# Altium PCB PDP_V2 - Copy.PcbDoc
Units mil, origin at the board's own origin, x right, y up, seen from the top; angles counter-clockwise.
Board outline 5460 x 4800 mil, 2 copper layers (Top Layer, Bottom Layer); 52 components, 42 nets, 329 pads, 53 vias.
Unrouted connection lines stored in the file: 27.
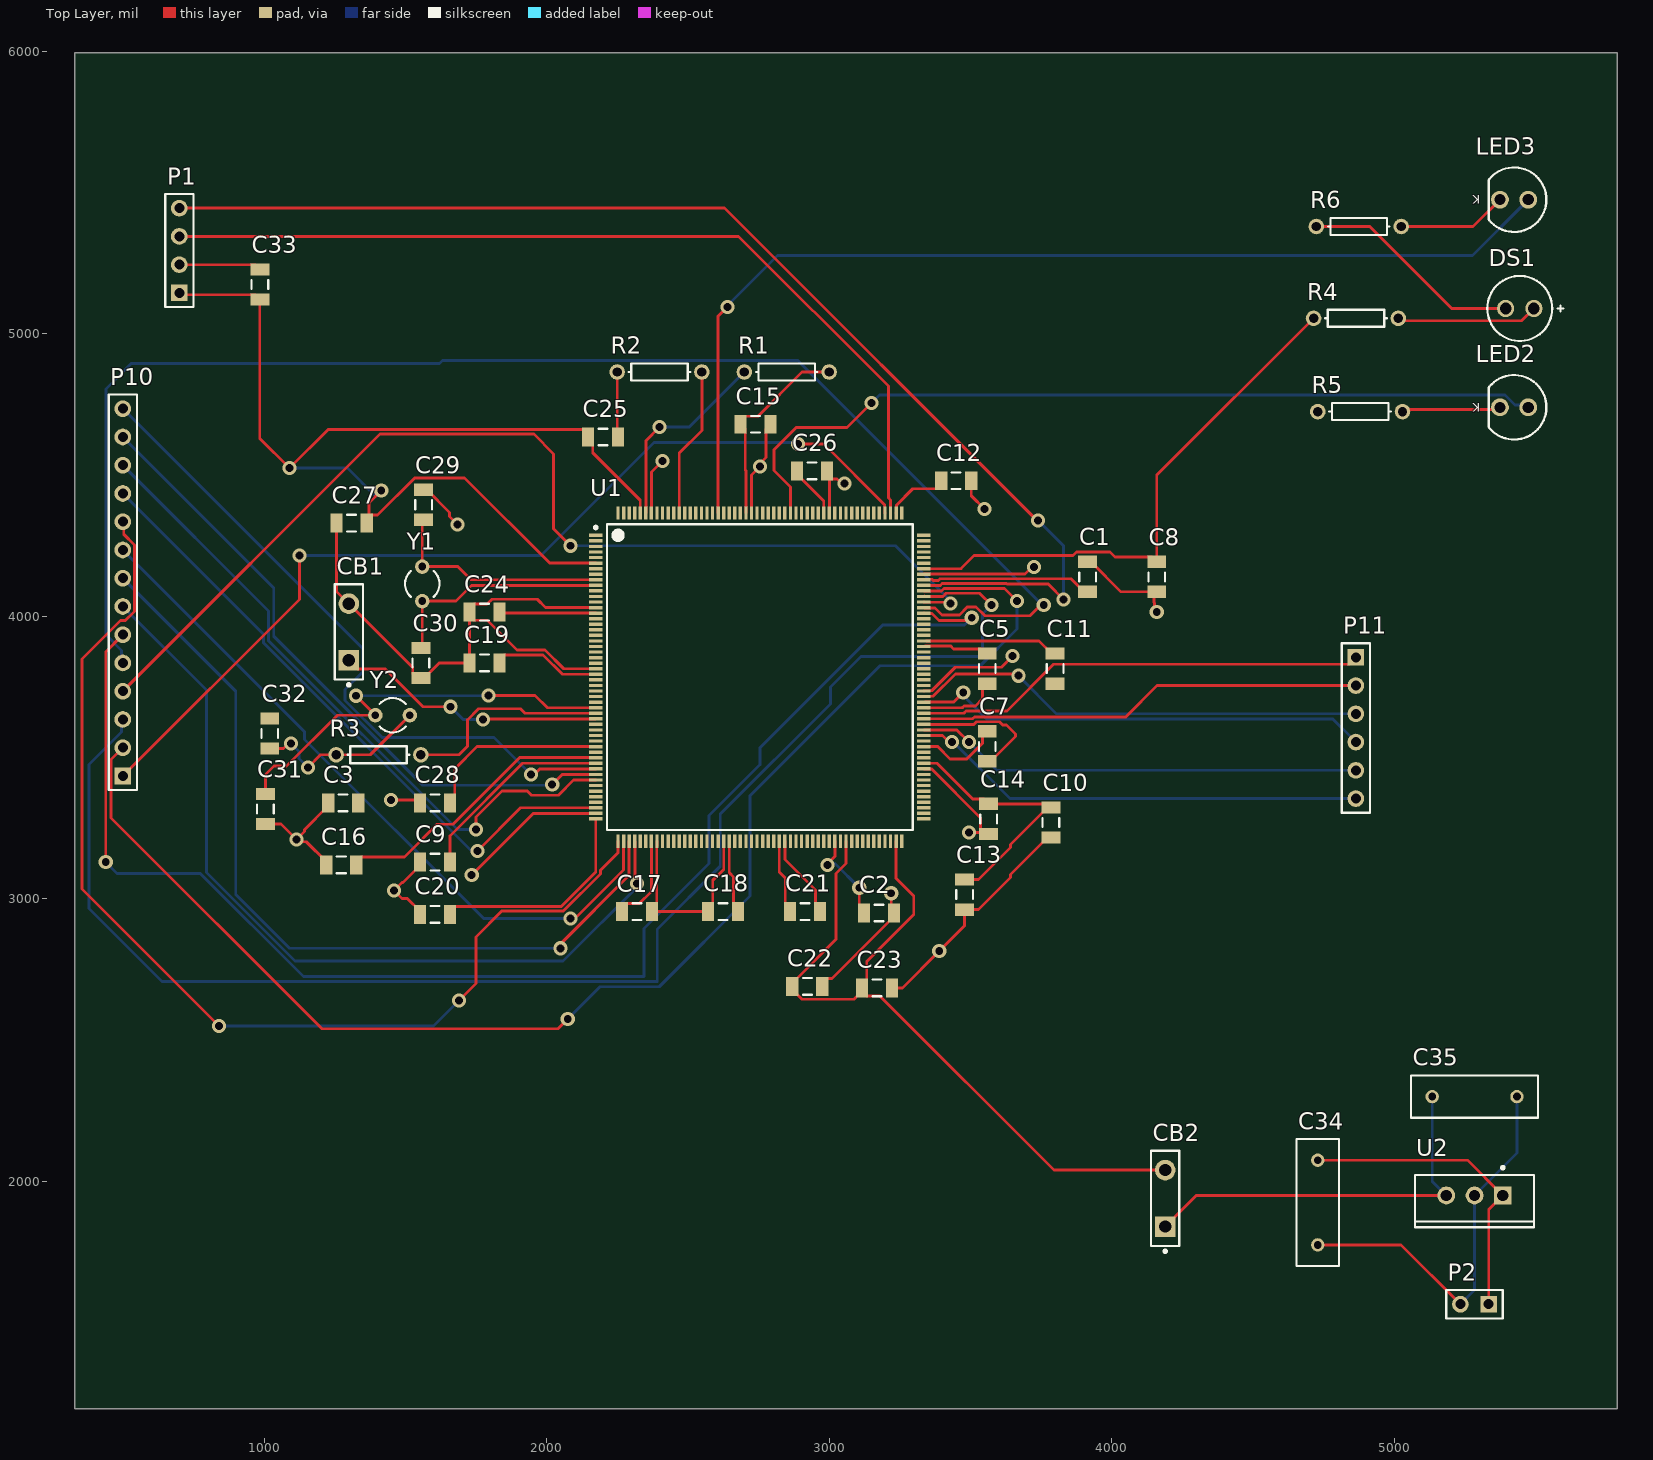
[diagram p0: Top Layer view]
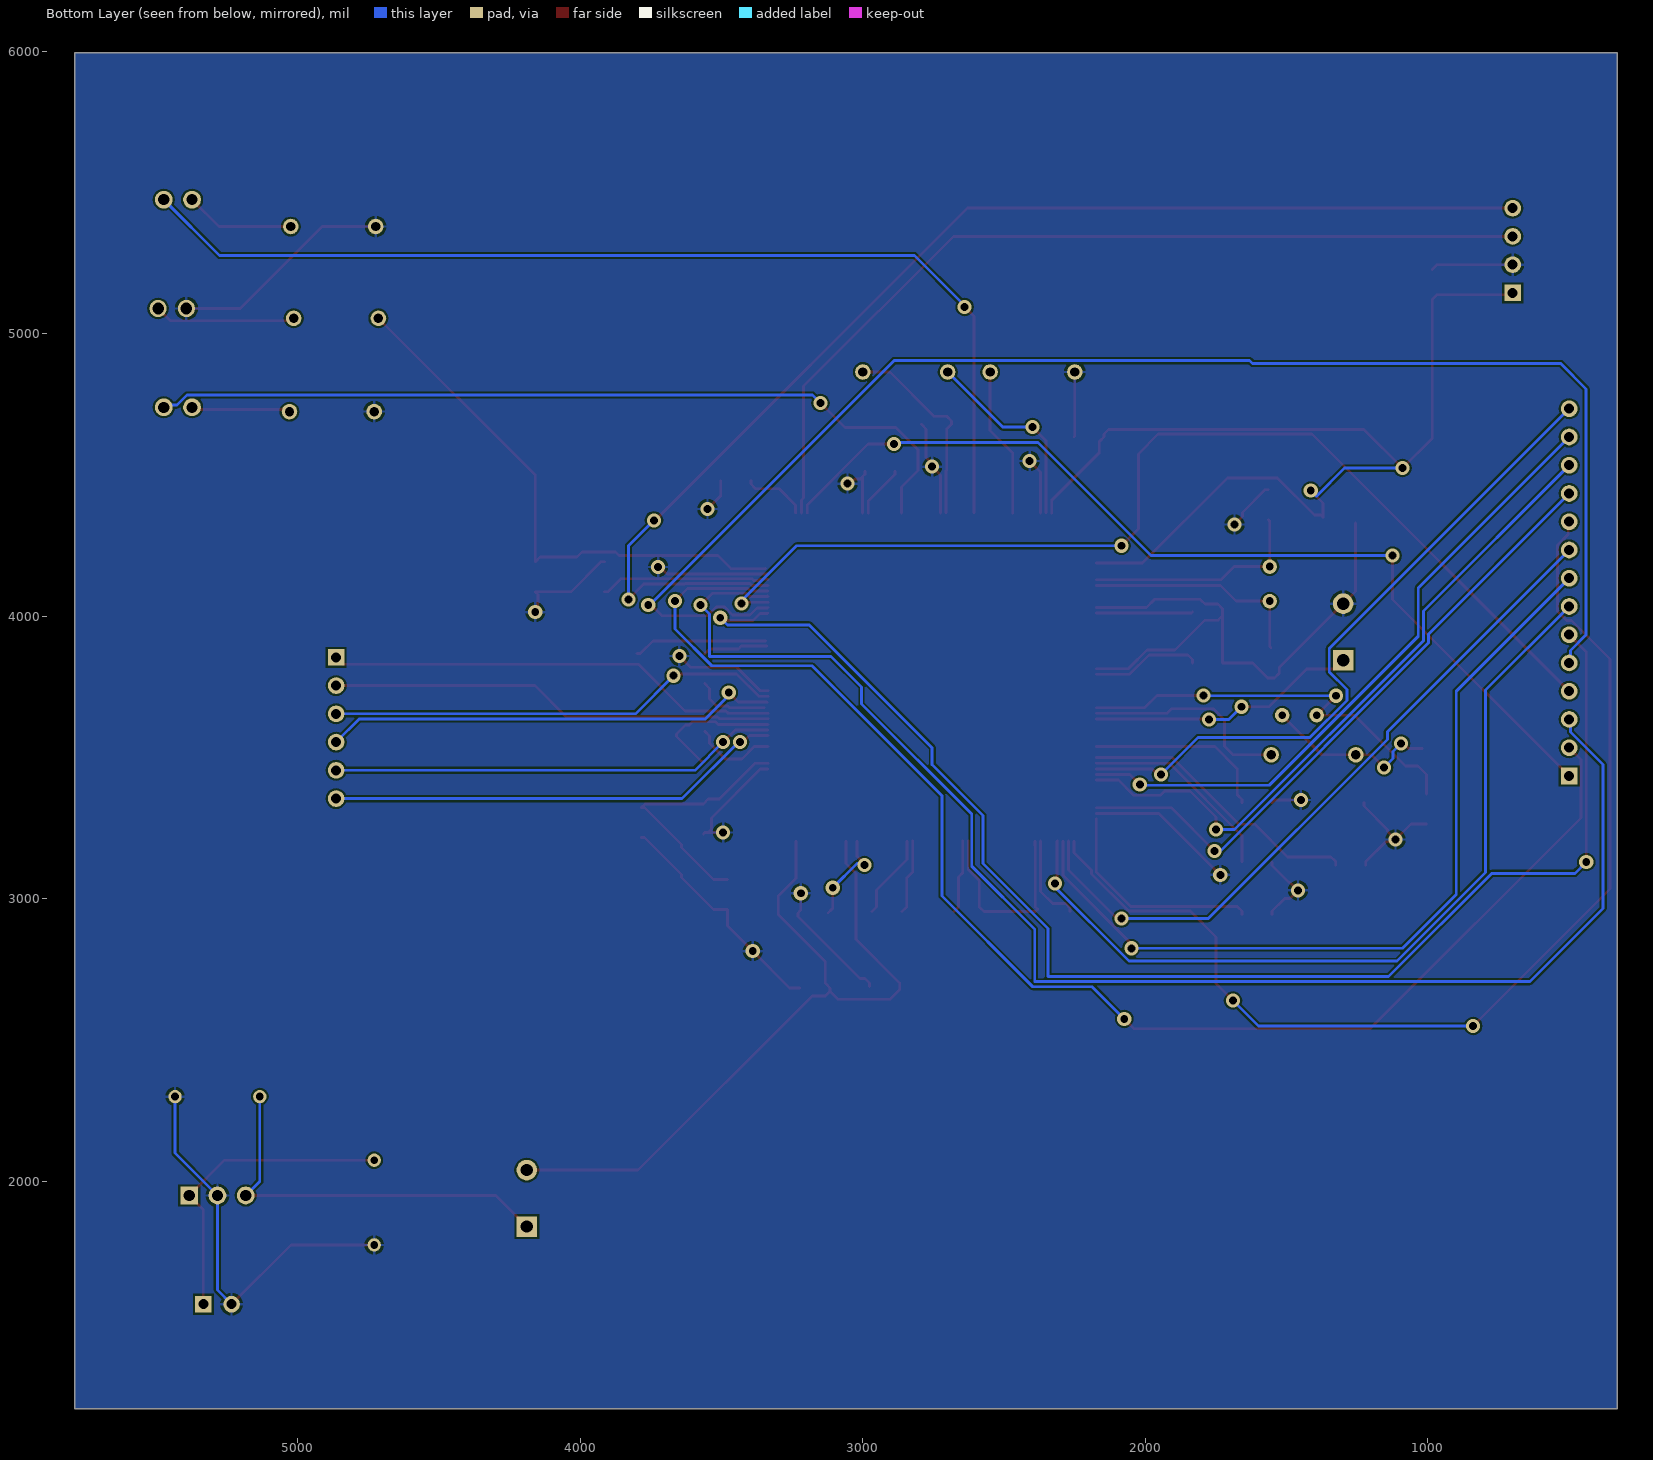
[diagram p1: Bottom Layer view, seen from below]

## Layer stack, top to bottom
Top Solder: solder mask 0.4, Solder Resist, Dk 3.5
Top Layer: signal copper 1.4
Dielectric 1: dielectric 12.6, FR-4, Dk 4.8
Bottom Layer: signal copper 1.4
Bottom Solder: solder mask 0.4, Solder Resist, Dk 3.5

## Board outline
330,1195 5790,1195 5790,5995 330,5995

## Design rules (kind name [scope] priority, off if disabled: settings)
Clearance [All] p1: gap=7 ignorepadtopadclearanceinfootprint=FALSE except(0: Arc-Hole Track-Hole SMDPad-Hole THPad-Hole Via-Hole Fill-Hole Poly-Hole Region-Hole Text-Hole)
PolygonConnect [All] p1: connectstyle=Relief reliefconductorwidth=10 reliefentries=4 polygonreliefangle="90 Angle" airgapwidth=10
RoutingVias [All] p1: holewidth=28 width=50 viastyle="Through Hole" minholewidth=28 minwidth=50 maxholewidth=28 maxwidth=50
SolderMaskExpansion [All] p1: expansion=4
Width [All] p1: maxlimit=10 minlimit=10 preferedwidth=10
30 further rules are at their usual default settings.

## Components (designator, comment, footprint, x,y, rotation, side; value= is the part's Value field where it differs from the comment)
C1 "VCAP2" C1206 3915,4140 r90 top value=2.2uF
C2 "VCAP1" C1206 3176.85,2950 r0 top value=2.2uF
C3 "NRST Cap" C1206 1280,3340 r0 top value=0.1uF
C5 "DSI_Filter2" C1206 3560,3815 r270 top value=2.2uF
C7 "DSI_Filter3" C1206 3560,3540 r90 top value=100nF
C8 "DSI_Filter3" C1206 4160,4140 r90 top value=100nF
C9 "DSI_Filter3" C1206 1605,3130 r0 top value=100nF
C10 "DSI_Filter3" C1206 3785,3270 r90 top value=100nF
C11 "DSI_Filter3" C1206 3800,3815 r90 top value=100nF
C12 "DSI_Filter3" C1206 3450,4480 r180 top value=100nF
C13 "DSI_Filter3" C1206 3480,3015 r90 top value=100nF
C14 "DSI_Filter3" C1206 3565,3283.15 r90 top value=100nF
C15 "DSI_Filter3" C1206 2740,4680 r180 top value=100nF
C16 "DSI_Filter3" C1206 1273.15,3120 r0 top value=100nF
C17 "DSI_Filter3" C1206 2320,2955 r180 top value=100nF
C18 "DSI_Filter3" C1206 2625,2955 r0 top value=100nF
C19 "DSI_Filter3" C1206 1780,3835 r0 top value=100nF
C20 "DSI_Filter3" C1206 1605,2945 r0 top value=100nF
C21 "DSI_Filter3" C1206 2915,2955 r0 top value=100nF
C22 "DSI_Filter3" C1206 2923.15,2690 r180 top value=100nF
C23 "DSI_Filter3" C1206 3170,2685 r180 top value=100nF
C24 "DSI_Filter3" C1206 1780,4015 r0 top value=100nF
C25 "DSI_Filter3" C1206 2200,4635 r180 top value=100nF
C26 "DSI_Filter3" C1206 2940,4515 r180 top value=100nF
C27 "DSI_Filter3" C1206 1310,4330 r0 top value=4.7uF
C28 "DSI_Filter3" C1206 1605,3340 r0 top value=1uF
C29 "DSI_Filter3" C1206 1565,4395 r90 top value=12.5pF
C30 "DSI_Filter3" C1206 1555,3835 r270 top value=12.5pF
C31 "DSI_Filter3" C1206 1005,3318.15 r90 top value=18pF
C32 "DSI_Filter3" C1206 1020,3585 r270 top value=18pF
C33 "DSI_Filter3" C1206 985,5175 r270 top value=100nF
C34 "Cap" RAD-0.3 4730,1925 r90 top value=0.47uF
C35 "Cap" RAD-0.3 5285,2300 r180 top value=33uF
CB1 "Reset Button" SPST-2 1300,3945 r90 top
CB2 "REG_PWR" SPST-2 4190,1940 r90 top
DS1 "PWR_LED" AVAG-HLMP-4740 5445,5090 r180 top
LED2 "STATUS1" "Type 5mm" 5425,4740 r180 top
LED3 "STATUS2" "Type 5mm" 5425,5475 r180 top
P1 "Header 4" HDR1X4 700,5145 r90 top
P2 "Header 2" HDR1X2 5335,1565 r180 top
P10 "Header 14" HDR1X14 500,3435 r90 top
P11 "Header 6" HDR1X6 4865,3855 r270 top
R1 "PDR_Pullup" AXIAL-0.3 2850,4865 r0 top value=10K
R2 "BOOT_Pulldown" AXIAL-0.3 2400,4865 r0 top value=10K
R3 "Inverter_Lim" AXIAL-0.3 1405,3510 r0 top value=100
R4 "Inverter_Lim" AXIAL-0.3 4865,5055 r0 top value=100
R5 "Inverter_Lim" AXIAL-0.3 4880,4725 r180 top value=100
R6 "Inverter_Lim" AXIAL-0.3 4875,5380 r180 top value=100
U1 "STM32F769BIT6" STM-LQFP208_V 2755,3785 r0 top
U2 "LM3940IT-3.3" NDE0003A 5285,1950 r180 top
Y1 "XTAL 32.768 kHz" R38 1560,4115 r0 top
Y2 "XTAL 25 MHz" R38 1455,3650 r90 top

## Footprints (in the part's own frame and the unit in brackets; to place one, negate y for a bottom-side part, rotate by r counter-clockwise, add the part's x,y. Pads: shape width x height; smd on the part's side, far side on the other; paste and mask are expansions set on the pad)
AVAG-HLMP-4740 [mm] "THD, 2-Leads, Dia 5.845mm, Pitch 2.54mm"
  round 1.55 hole 1.05: 1(-1.27,0) 2(1.27,0)
  silkscreen extent -3.92,-2.92 2.92,2.92
AXIAL-0.3 [mm] "Axial Device, Thru-Hole; 2 Leads; 0.3 in Pin Spacing"
  round 1.4 hole 0.85: 1(-3.81,0) 2(3.81,0)
  silkscreen extent -2.77,-0.76 2.77,0.76
C1206 [mm] "Chip Capacitor, Body 3.2x1.6mm, IPC High Density"
  rect 1.1x1.7 smd: 1(-1.35,0) 2(1.35,0)
  silkscreen extent -0.4,-0.75 0.4,0.75, body extent -1.7,-0.9 1.7,0.9, height 1.3
HDR1X2 [mm] "Connector; Header; 2 Position"
  rect 1.5x1.5 hole 0.9: 1(0,0)
  round 1.5 hole 0.9: 2(2.54,0)
  silkscreen extent -1.27,-1.27 3.81,1.27
HDR1X4 [mm] "Connector; Header; 4 Position"
  rect 1.5x1.5 hole 0.9: 1(0,0)
  round 1.5 hole 0.9: 2(2.54,0) 3(5.08,0) 4(7.62,0)
  silkscreen extent -1.27,-1.27 8.89,1.27
HDR1X6 [mm] "Connector; Header; 6 Position"
  rect 1.5x1.5 hole 0.9: 1(0,0)
  round 1.5 hole 0.9: 2(2.54,0) 3(5.08,0) 4(7.62,0) 5(10.16,0) 6(12.7,0)
  silkscreen extent -1.27,-1.27 13.97,1.27
HDR1X14 [mm] "Connector; Header; 14 Position"
  rect 1.5x1.5 hole 0.9: 1(0,0)
  round 1.5 hole 0.9: 2(2.54,0) 3(5.08,0) 4(7.62,0) 5(10.16,0) 6(12.7,0) 7(15.24,0) 8(17.78,0) 9(20.32,0) 10(22.86,0) 11(25.4,0) 12(27.94,0) 13(30.48,0) 14(33.02,0)
  silkscreen extent -1.27,-1.27 34.29,1.27
NDE0003A [mm] "FM, 3-Leads, Body 10.7x4.7mm, Pitch 2.54mm"
  rect 1.6x1.6 hole 1: 1(-2.54,0)
  round 1.6 hole 1: 2(0,0) 3(2.54,0)
  silkscreen extent -5.35,-2.62 5.35,2.85, body extent -5.4,-1.9 5.4,2.9, height 19.4
R38 [mm] "Crystal, Thru-Hole; 2 Leads; Body 3.1 x 8.2 mm (Dia.xH)"
  round 1.3 hole 0.7: 1(0,1.55) 2(0,-1.55)
  silkscreen extent -1.55,-1.19 1.55,1.17
RAD-0.3 [mm] "Radial Cap, Thru-Hole; 2 Leads; 0.3 in Pin Spacing"
  round 1.2 hole 0.7: 1(-3.81,0) 2(3.81,0)
  silkscreen extent -5.71,-1.91 5.71,1.91
SPST-2 [mm] "Switch; 2 Leads"
  rect 1.85x1.85 hole 1.1: 1(-2.54,0)
  round 1.85 hole 1.1: 2(2.54,0)
  silkscreen extent -4.89,-1.27 4.28,1.27
STM-LQFP208_V [mm] "QFP, 208-Leads, Body 28x28mm, Pitch 0.5mm"
  rect 1.2x0.3 smd: 1(-14.75,12.75) 2(-14.75,12.25) 3(-14.75,11.75) 4(-14.75,11.25) 5(-14.75,10.75) 6(-14.75,10.25) 7(-14.75,9.75) 8(-14.75,9.25) 9(-14.75,8.75) 10(-14.75,8.25) 11(-14.75,7.75) 12(-14.75,7.25) 13(-14.75,6.75) 14(-14.75,6.25) 15(-14.75,5.75) 16(-14.75,5.25) 17(-14.75,4.75) 18(-14.75,4.25) 19(-14.75,3.75) 20(-14.75,3.25) 21(-14.75,2.75) 22(-14.75,2.25) 23(-14.75,1.75) 24(-14.75,1.25) 25(-14.75,0.75) 26(-14.75,0.25) 27(-14.75,-0.25) 28(-14.75,-0.75) 29(-14.75,-1.25) 30(-14.75,-1.75) 31(-14.75,-2.25) 32(-14.75,-2.75) 33(-14.75,-3.25) 34(-14.75,-3.75) 35(-14.75,-4.25) 36(-14.75,-4.75) 37(-14.75,-5.25) 38(-14.75,-5.75) 39(-14.75,-6.25) 40(-14.75,-6.75) 41(-14.75,-7.25) 42(-14.75,-7.75) 43(-14.75,-8.25) 44(-14.75,-8.75) 45(-14.75,-9.25) 46(-14.75,-9.75) 47(-14.75,-10.25) 48(-14.75,-10.75) 49(-14.75,-11.25) 50(-14.75,-11.75) 51(-14.75,-12.25) 52(-14.75,-12.75) 105(14.75,-12.75) 106(14.75,-12.25) 107(14.75,-11.75) 108(14.75,-11.25) 109(14.75,-10.75) 110(14.75,-10.25) 111(14.75,-9.75) 112(14.75,-9.25) 113(14.75,-8.75) 114(14.75,-8.25) 115(14.75,-7.75) 116(14.75,-7.25) 117(14.75,-6.75) 118(14.75,-6.25) 119(14.75,-5.75) 120(14.75,-5.25) 121(14.75,-4.75) 122(14.75,-4.25) 123(14.75,-3.75) 124(14.75,-3.25) 125(14.75,-2.75) 126(14.75,-2.25) 127(14.75,-1.75) 128(14.75,-1.25) 129(14.75,-0.75) 130(14.75,-0.25) 131(14.75,0.25) 132(14.75,0.75) 133(14.75,1.25) 134(14.75,1.75) 135(14.75,2.25) 136(14.75,2.75) 137(14.75,3.25) 138(14.75,3.75) 139(14.75,4.25) 140(14.75,4.75) 141(14.75,5.25) 142(14.75,5.75) 143(14.75,6.25) 144(14.75,6.75) 145(14.75,7.25) 146(14.75,7.75) 147(14.75,8.25) 148(14.75,8.75) 149(14.75,9.25) 150(14.75,9.75) 151(14.75,10.25) 152(14.75,10.75) 153(14.75,11.25) 154(14.75,11.75) 155(14.75,12.25) 156(14.75,12.75)
  rect 0.3x1.2 smd: 53(-12.75,-14.75) 54(-12.25,-14.75) 55(-11.75,-14.75) 56(-11.25,-14.75) 57(-10.75,-14.75) 58(-10.25,-14.75) 59(-9.75,-14.75) 60(-9.25,-14.75) 61(-8.75,-14.75) 62(-8.25,-14.75) 63(-7.75,-14.75) 64(-7.25,-14.75) 65(-6.75,-14.75) 66(-6.25,-14.75) 67(-5.75,-14.75) 68(-5.25,-14.75) 69(-4.75,-14.75) 70(-4.25,-14.75) 71(-3.75,-14.75) 72(-3.25,-14.75) 73(-2.75,-14.75) 74(-2.25,-14.75) 75(-1.75,-14.75) 76(-1.25,-14.75) 77(-0.75,-14.75) 78(-0.25,-14.75) 79(0.25,-14.75) 80(0.75,-14.75) 81(1.25,-14.75) 82(1.75,-14.75) 83(2.25,-14.75) 84(2.75,-14.75) 85(3.25,-14.75) 86(3.75,-14.75) 87(4.25,-14.75) 88(4.75,-14.75) 89(5.25,-14.75) 90(5.75,-14.75) 91(6.25,-14.75) 92(6.75,-14.75) 93(7.25,-14.75) 94(7.75,-14.75) 95(8.25,-14.75) 96(8.75,-14.75) 97(9.25,-14.75) 98(9.75,-14.75) 99(10.25,-14.75) 100(10.75,-14.75) 101(11.25,-14.75) 102(11.75,-14.75) 103(12.25,-14.75) 104(12.75,-14.75) 157(12.75,14.75) 158(12.25,14.75) 159(11.75,14.75) 160(11.25,14.75) 161(10.75,14.75) 162(10.25,14.75) 163(9.75,14.75) 164(9.25,14.75) 165(8.75,14.75) 166(8.25,14.75) 167(7.75,14.75) 168(7.25,14.75) 169(6.75,14.75) 170(6.25,14.75) 171(5.75,14.75) 172(5.25,14.75) 173(4.75,14.75) 174(4.25,14.75) 175(3.75,14.75) 176(3.25,14.75) 177(2.75,14.75) 178(2.25,14.75) 179(1.75,14.75) 180(1.25,14.75) 181(0.75,14.75) 182(0.25,14.75) 183(-0.25,14.75) 184(-0.75,14.75) 185(-1.25,14.75) 186(-1.75,14.75) 187(-2.25,14.75) 188(-2.75,14.75) 189(-3.25,14.75) 190(-3.75,14.75) 191(-4.25,14.75) 192(-4.75,14.75) 193(-5.25,14.75) 194(-5.75,14.75) 195(-6.25,14.75) 196(-6.75,14.75) 197(-7.25,14.75) 198(-7.75,14.75) 199(-8.25,14.75) 200(-8.75,14.75) 201(-9.25,14.75) 202(-9.75,14.75) 203(-10.25,14.75) 204(-10.75,14.75) 205(-11.25,14.75) 206(-11.75,14.75) 207(-12.25,14.75) 208(-12.75,14.75)
  silkscreen extent -14.87,-13.75 13.75,13.75, body extent -15,-15 15,15, height 1.6
"Type 5mm" [mm] "THT, LED-5mm, 2pin- Body 5.8mm"
  round 1.6 hole 1: 1(1.27,0) 2(-1.27,0)
  silkscreen extent -2.9,-2.9 2.29,2.9, body extent -2.9,-2.9 2.5,2.9, height 11.7

## Part data
C1 C2 C3 C5 C7 C8 C9 C10 C11 C12 C13 C14 C15 C16 C17 C18 C19 C20 C21 C22 C23 C24 C25 C26 C27 C28 C29 C30 C31 C32 C33: library part "Cap Semi", "Capacitor (Semiconductor SIM Model)", LatestRevisionDate=29-May-2009, LatestRevisionNote="IPC-7351 Footprint Added.", PackageDescription="Chip Capacitor", PackageReference=C1206, Published=8-Jun-2000, Publisher="Altium Limited"
C34 C35: "Capacitor", LatestRevisionDate=17-Jul-2002, LatestRevisionNote="Re-released for DXP Platform.", PackageDescription="Radial Cap, Thru-Hole; 2 Leads; 0.3 in Pin Spacing", PackageReference=RAD-0.3, Published=8-Jun-2000, Publisher="Altium Limited"
CB1 CB2: library part "Circuit Breaker", "Circuit Breaker", LatestRevisionDate=17-Jul-2002, LatestRevisionNote="Re-released for DXP Platform.", PackageDescription="Switch; 2 Leads", PackageReference=SPST-2, Published=24-Mar-1999, Publisher="Altium Limited"
DS1: library part CMP-2000-06413-1, "T-1 3/4 (5 mm) Low Current LED Lamp, Green, 1.9 V, -20 to 100 degC, 2-Pin THD, RoHS, Bulk", Color=Green, Dominant Wavelength/Color Temperature=569nm, Manufacturer=AvagoTechnologies, Package=2T-13/4, Package Description="2-Pin Through Hole Device, Dia 5.845 mm, Pitch 2.54 mm", Package Reference=HLMP-4740, Category=LEDs, Datasheet URL=http://docs.avagotech.com/docs/AV02-1557EN, Datasheet Version=07/2014, Intensity=2.3mcd, Lens Appearance=ColoredDiffused, Lens Shape Type=Circular, Manufacturer URL=http://www.avagotech.com/, Mounting=ThroughHole, Mounting Orientation=TopMount, Mounting Technology=ThroughHole, Number of LEDs=1, Packaging=Bulk, Peak Wavelength=565nm, Pin Count=2, Rad Hard=No, Type=Uni-Color, Viewing Angle=50°
LED2 LED3: library part CMP-1489-00006-1, "THT LED round mono-color waterclear, WL-TMRW ,Blue", Emitting color=Blue, Manufacturer="Wuerth Elektronik", PartNumber=151053BS04500, ComponentLink1Description="Manufacturer URL", ComponentLink1URL=http://www.we-online.com, ComponentLink2Description=Datasheet, ComponentLink2URL=http://katalog.we-online.de/pbs/datasheet/7448042001.pdfhttp://katalog.we-online.de/pbs/datasheet/7448042001.pdfhttp://katalog.we-online.de/pbs/datasheet/7448042001.pdfhttp://katalog.we-online.de/pbs/datasheet/151053BS04500.pdf, PackageReference="Type 5mm"
P1: "Header, 4-Pin", LatestRevisionDate=17-Jul-2002, LatestRevisionNote="Re-released for DXP Platform.", Publisher="Altium Limited"
P2: "Header, 2-Pin", LatestRevisionDate=17-Jul-2002, LatestRevisionNote="Re-released for DXP Platform.", Publisher="Altium Limited"
P10: "Header, 14-Pin", LatestRevisionDate=17-Jul-2002, LatestRevisionNote="Re-released for DXP Platform.", Publisher="Altium Limited"
P11: "Header, 6-Pin", LatestRevisionDate=17-Jul-2002, LatestRevisionNote="Re-released for DXP Platform.", Publisher="Altium Limited"
R1 R2 R3 R4 R5 R6: library part Res1, "Resistor", LatestRevisionDate=17-Jul-2002, LatestRevisionNote="Re-released for DXP Platform.", PackageDescription="Axial Device, Thru-Hole; 2 Leads; 0.3 in Pin Spacing", PackageReference=AXIAL-0.3, Published=8-Jun-2000, Publisher="Altium Limited"
U1: library part CMP-2000-07163-1, "ARM-Based Cortex-M7 32 Bit MCU+FPU, 462 DMIPS, 2048 kB Flash, 512 kB SRAM, 168 I/Os, -40 to 85 degC, 208-Pin LQFP, RoHS, Tray", Manufacturer=STMicroelectronics, MCU Case Style=LQFP, Package Description="208-Pin Low Profile Quad Flat Package, 28 x 28 mm Body, 0.5 mm Pitch", Package Reference=LQFP-208, Supply Voltage Max=3.6V, Supply Voltage Min=1.7V, Architecture=ARMCortex-M7, Automotive Qualification Standard=-, CPU Speed=216MHz, Datasheet URL=http://www.st.com/resource/en/datasheet/stm32f769bi.pdf, Datasheet Version="Rev. 3, 05/2016", Embedded Interface Type=CAN,Ethernet,I2C,I2S,SPI,UART,USART,USB, Manufacturer URL=http://www.st.com/, Mounting Technology=SurfaceMount, MSL=MSL3-168hours, No. of I/O's=168I/O's, No. of Pins=208Pins, Packaging=Each, Product Range=STM32F7ARMCortex-M7Microcontrollers, Program Memory Size=2MB, RAM Memory Size=512KB, SVHC=NoSVHC(17-Dec-2015)
U2: library part CMP-0062-02465-3, "1A Low Dropout Regulator for 5V to 3.3V Conversion, 3-pin TO-220", Manufacturer="Texas Instruments", PackageTopMarking="NSUZXYTTE#*LM3940IT*-3.3 P+", PowerWise=N, ComponentLink1Description="Datasheet URL", ComponentLink1URL=http://www.ti.com/general/docs/lit/getliterature.tsp?genericPartNumber=LM3940&fileType=pdf, CompType="LDO IC", PackageDescription="TO-220, Molded, 3 Lead, Straight", PackageReference=NDE0003A, PinCount=3, RoHS=N
Y1 Y2: library part XTAL, "Crystal Oscillator", LatestRevisionDate=17-Jul-2002, LatestRevisionNote="Re-released for DXP Platform.", PackageDescription="Crystal, Thru-Hole; 2 Leads; Body 3.1 x 8.2 mm (Dia.xH)", PackageReference=R38, Published=8-Jun-2000, Publisher="Altium Limited"

## Via types
v1: diameter 50, hole 28, Top Layer to Bottom Layer, 53 vias

## Nets (pads, with @x,y where several pads share a name; then routed paths per layer and width w, separated by ;. In a path a pad name is that pad's centre, name@x,y a point inside that pad or via, vN(x,y) a via of type N, cw(c..) or ccw(c..) an arc to the next point about the centre after c; other vN are vias at no path point)
GND: C1.2 C2.2 C3.1 C5.1 C7.1 C8.1 C9.1 C10.1 C11.1 C12.1 C13.1 C14.1 C15.1 C16.1 C17.1 C18.1 C19.1 C20.1 C21.1 C22.1 C23.1 C24.1 C25.1 C26.1 C27.1 C28.1 C29.2 C30.2 C31.1 C32.1 C33.1 C34.1 C35.1 CB1.2 DS1.2 P1.2 P2.2 R2.1 R5.2 R6.2 U1.14 U1.25 U1.40 U1.51 U1.60 U1.72 U1.82 U1.93 U1.114 U1.122 U1.128 U1.136 U1.149 U1.170 U1.184 U1.202 U2.2 | length 11717.9
  Top Layer w10: P1.2 700.2,5244.8 968.35,5244.8 C33.1 ; C31.1 1060,3265 v1(1115,3210) ; C16.1 1220,3131.81 1149.46,3202.35 1122.65,3202.35 v1(1115,3210) ; C3.1 1226.85,3328.19 1143.28,3244.62 1143.28,3238.28 v1(1115,3210) ; C27.1 1256.85,4088.15 CB1.2 1526.54,3818.46 1526.54,3798.5 1543.19,3781.85 C30.2 1566.81,3781.85 1619.96,3835 C19.1 C24.1@1726.85,4003.19 ; v1(1450,3350) 1541.85,3350 C28.1 ; C20.1 1551.85,2956.81 1506.95,3001.72 1488.28,3001.72 v1(1460,3030) 1488.28,3058.28 1491.95,3058.28 1551.85,3118.19 C9.1 ; C29.2 1576.81,4448.15 1656.72,4368.24 1656.72,4353.28 v1(1685,4325) ; v1(1735,3085) 1952.72,3302.72 U1.51 ; U1.25 2060.73,3814.53 1994.8,3880.46 1895.6,3880.46 1789.53,3986.54 1743.5,3986.54 C24.1@1726.85,4003.19 ; U1.14 1996.25,4031.06 1966.85,4060.46 1806.53,4060.46 1789.53,4043.46 1743.5,4043.46 1726.85,4026.81 C24.1 C24.1@1726.85,4003.19 ; R2.1 2250,4638.15 C25.1 ; U1.202 2371.14,4511.14 v1(2410,4550) ; U1.60 2390.83,3186.57 2389.8,3185.55 2389.8,2971.65 2381.48,2963.33 2389.8,2955 C18.1 2588.5,2971.65 2588.5,3065.75 2627.05,3104.29 U1.72 ; U1.184 2725.47,4500.47 v1(2755,4530) 2755,4540.82 2776.5,4562.32 2776.5,4663.35 C15.1 ; U1.82 2823.9,3095.67 2845.2,3074.37 2845.2,2971.65 C21.1 ; C22.1 2976.3,2701.81 2992.95,2718.46 3010.28,2718.46 3230,2938.19 C2.2 3220,2960 v1(3220,3020) ; C26.1 2993.15,4503.19 C26.1@3001.06,4495.28 ; U1.170 C26.1@3001.06,4495.28 ; v1(3055,4470) 3044.18,4470 3027.64,4486.54 3009.8,4486.54 C26.1@3001.06,4495.28 ; C23.1 3260,2685 v1(3390,2815) 3480,2905 C13.1 3528.46,2961.85 3642.5,3075.89 3642.5,3086.16 3773.19,3216.85 C10.1 ; U1.114 3336.61,3459.29 3363.43,3459.29 3536.54,3286.18 3536.54,3246.65 C14.1@3548.19,3235 ; U1.122 3512.44,3617.68 3521.56,3626.8 3603.2,3626.8 3615,3615 3628.24,3615 3659.96,3583.28 3659.96,3575 3571.81,3486.85 C7.1 ; U1.128 3336.61,3736.69 3363.43,3736.69 3446.73,3820 3610,3820 v1(3650,3860) ; U1.149 3336.54,4150 3693.43,4150 3718.43,4175 v1(3725,4175) ; U1.136@3340,3895.05 3430.65,3895.05 3440.89,3884.8 3543.35,3884.8 C5.1 ; v1(3495,3235) C14.1@3548.19,3235 ; C12.1 3503.15,4426.85 v1(3550,4380) ; C14.1 3560,3235 C14.1@3548.19,3235 ; C1.2 3926.81,4193.15 4033.11,4086.85 C8.1 4150,4076.85 4150,4050 4152.35,4047.65 4152.35,4022.65 v1(4160,4015) ; R6.2 4914.2,5380 5204.2,5090 DS1.2 ; C34.1 5025,1775 P2.2
  Bottom Layer w10: P2.2 5285,1615 U2.2 5435,2100 C35.1
NetC1_1: C1.1 U1.148 | length 603.6
  Top Layer w10: U1.148 3337.49,4131.27 3364.3,4131.27 3368.77,4126.8 3387.06,4126.8 3393.25,4133 3857.04,4133 3903.19,4086.85 C1.1
NetC2_1: C2.1 U1.92 | length 313.7
  Top Layer w10: v1(2995,3120) 2995,3125.07 3020.75,3150.82 U1.92 ; v1(3107.05,3039.31) 3107.05,2966.65 C2.1
  Bottom Layer w10: 3020,3125 3021.35,3125 v1(3107.05,3039.31)
NetC3_2: C3.2 CB1.1 U1.34 | length 962.9
  Top Layer w10: CB1.1 1331.42,3813.58 1428.92,3813.58 1562.5,3680 v1(1660,3680) ; v1(1775,3635) 1777.36,3637.36 1778.14,3636.58 2173.51,3636.58 U1.34
  Bottom Layer w10: v1(1660,3680) 1705,3635 v1(1775,3635)
NetC29_1: C29.1 U1.9 Y1.1 | length 801.5
  Top Layer w10: C29.1 1560,4336.85 Y1.1 1685.53,4176.02 1732.06,4129.49 U1.9
NetC30_1: C30.1 U1.10 Y1.2 | length 805.3
  Top Layer w10: C30.1 1560,3893.15 Y1.2 1678.98,4053.98 1734.8,4109.8 U1.10
NetC31_2: C31.2 U1.32 Y2.1 | length 1510.9
  Top Layer w10: C31.2 1005,3440 1035,3470 1080,3470 1260,3650 Y2.1 v1(1325,3718.98) v1@1325,3720 ; v1(1795,3720) 1959.5,3720 2002.77,3676.73 U1.32
  Bottom Layer w10: v1(1325,3718.98) 1793.98,3718.98 v1(1795,3720)
NetC32_2: C32.2 R3.1 Y2.2 | length 636.6
  Top Layer w10: C32.2 1068.46,3531.85 1086.61,3550 v1(1095,3550) ; v1(1155,3465) 1200,3510 R3.1 1376.02,3510 Y2.2
  Bottom Layer w10: v1@1088.43,3550 v1(1095,3550) 1123.28,3521.72 1123.28,3496.72 v1(1155,3465)
NetC35_2: C35.2 CB2.1 U2.3 | length 1411.3
  Top Layer w10: CB2.1 4300,1950 U2.3
  Bottom Layer w10: C35.2 5135,2000 U2.3
NetDS1_1: DS1.1 R4.2 | length 501.5
  Top Layer w10: R4.2 5023.51,5046.49 5451.49,5046.49 DS1.1
NetLED2_1: LED2.1 R5.1 | length 351.2
  Top Layer w10: R5.1 5037.5,4732.5 5367.5,4732.5 LED2.1
NetLED2_2: LED2.2 U1.177 | length 3016.6
  Top Layer w10: U1.177 2863.27,4457.58 2805,4515.85 2805,4590 2883.67,4668.67 3063.67,4668.67 v1(3150,4755)
  Bottom Layer w10: v1(3150,4755) 3178.5,4783.5 5393.02,4783.5 5428.5,4748.01 5466.99,4748.01 LED2.2
NetLED3_1: LED3.1 R6.1 | length 389.4
  Top Layer w10: R6.1 5280,5380 LED3.1
NetLED3_2: LED3.2 U1.190 | length 3747.3
  Top Layer w10: U1.190 2607.36,5062.36 v1(2640,5095)
  Bottom Layer w10: v1@2630,5090 2817.43,5277.43 5277.43,5277.43 LED3.2
NetP10_1: P10.1 U1.160 | length 3397.3
  Top Layer w10: P10.1 1125,4060 v1(1125,4215) ; v1(2890,4610) 2981.85,4610 3197.13,4394.72 3197.13,4366.49 U1.160
  Bottom Layer w10: v1(1125,4215) 1980,4215 2380,4615 2885,4615 v1(2890,4610)
NetP10_2: P10.2 U1.146 | length 5011.7
  Top Layer w10: P10.2 458.47,3493.47 458.47,3286.53 1205,2540 2040,2540 v1(2075,2575) ; U1.146 3398.46,4090.12 3407.34,4099 3621,4099 v1(3665,4055)
  Bottom Layer w10: v1(2075,2575) 2189,2689 2399,2689 2720,3010 2720,3365 3180,3825 3535,3825 3665,3955 v1@3665,4040
NetP10_3: P10.3 U1.145 | length 5176.4
  Top Layer w10: U1.145@3337.49,4072.21 U1.145 3402.81,4070.43 3414.38,4082 3533,4082 v1(3575,4040)
  Bottom Layer w10: P10.3 495.33,3630.33 495.33,3590.47 380,3475.14 380,2965.86 638.86,2707 2391.54,2707 2391.54,2891.77 2615,3115.23 2615,3300 3005,3690 3005,3750 3113.46,3858.46 3543,3858.46 3543,4008 v1(3575,4040)
NetP10_4: P10.4 U1.144 | length 3810.3
  Top Layer w10: P10.4 1410,4645 1955,4645 2025,4575 2025,4310 v1(2085,4250) ; U1.144 3336.61,4049.84 3425.16,4049.84 v1(3430,4045)
  Bottom Layer w10: v1(2085,4250) 3235,4250 v1@3435,4050
NetP10_5: P10.5 U1.143 | length 5188.8
  Top Layer w10: U1.143 3337.49,4029.28 3375,4029.28 3399.28,4005 3461.26,4005 3489.26,4033 3520.74,4033 3551.74,4002 3711.18,4002 3749.18,4040 v1(3760,4040)
  Bottom Layer w10: P10.5 495.33,3839.67 495.33,3879.53 440,3934.86 440,4805 530,4895 1620.62,4895 1631.18,4905.56 2889.44,4905.56 v1@3757.5,4037.5
NetP10_6: P10.6 U1.142 | length 5007.8
  Top Layer w10: v1(439.74,3130.26) 439.47,3130.53 439.47,3874.47 P10.6 ; U1.142 3337.49,4009.6 3364.3,4009.6 3388.9,3985 3495,3985 v1(3505,3995)
  Bottom Layer w10: v1(439.74,3130.26) 480,3090 774.09,3090 1139.09,2725 2345,2725 2345,2895 2575,3125 2575,3295 2755,3475 2755,3535 3190,3970 3480,3970 v1(3505,3995)
NetP10_7: P10.7 U1.56 | length 2992.9
  Top Layer w10: U1.56 2312.87,3203.51 2312.87,3062.13 v1(2320,3055)
  Bottom Layer w10: P10.7 795.97,3739.03 795.97,3093.58 1109.54,2780 2058.74,2780 v1@2330,3051.26
NetP10_8: P10.8 U1.55 | length 2994.1
  Top Layer w10: v1(2050,2825) 2050,2841.26 2292.4,3083.66 U1.55
  Bottom Layer w10: P10.8 900,3735 900,3015 1090,2825 v1(2050,2825)
NetP10_9: P10.9 U1.54 | length 2502.7
  Top Layer w10: v1(2085,2930) 2092.65,2937.65 2108.11,2937.65 2272.72,3102.26 U1.54
  Bottom Layer w10: P10.9 1143.51,3591.49 1143.51,3564.13 1777.64,2930 v1(2085,2930)
NetP10_10: P10.10 U1.53 | length 3895.8
  Top Layer w10: P10.10 503.26,4331.74 503.26,4290.47 541.53,4252.2 541.53,4017.8 508.73,3985 491.27,3985 355,3848.73 355,3035 v1(840,2550) ; v1(1690,2640) 1750,2700 1750,2865 1841.46,2956.46 2059.14,2956.46 2191.29,3088.62 2191.29,3101.29 2253.03,3163.03 U1.53
  Bottom Layer w10: v1(840,2550) 1600,2550 v1@1685,2635
NetP10_11: P10.11 U1.50 | length 2279.2
  Top Layer w10: v1(1755,3170) 1907.4,3322.4 U1.50
  Bottom Layer w10: P10.11 998.17,3936.83 998.17,3906.38 1734.54,3170 v1(1755,3170)
NetP10_12: P10.12 U1.45 | length 2368.8
  Top Layer w10: v1(1750,3245) 1750,3289.54 1842.73,3382.27 1931.6,3382.27 1946.87,3367 2042,3367 2095.83,3420.83 U1.45
  Bottom Layer w10: P10.12 1016.17,4018.83 1016.17,3913.83 1685,3245 1730,3245 v1@1735,3250
NetP10_13: P10.13 U1.44 | length 2307.8
  Top Layer w10: v1(2020,3405) 2055.51,3440.51 U1.44
  Bottom Layer w10: P10.13@504.67,4639.67 P10.13 1034.17,4100.83 1034.17,3929.78 1561.95,3402 2017,3402 v1(2020,3405)
NetP10_14: P10.14 U1.43 | length 2415.4
  Top Layer w10: v1(1945,3440) 1955.82,3440 1976.02,3460.2 U1.43
  Bottom Layer w10: P10.14 501.22,4735 1349.42,3886.8 1349.42,3803.2 1287,3740.78 1287,3702.4 1418.2,3571.2 1813.8,3571.2 v1(1945,3440)
NetP11_1: P11.1 U1.124 | length 1611.3
  Top Layer w10: U1.124 3477.05,3657.05 3485,3665 3629.65,3665 3795.12,3830.47 4840.47,3830.47 P11.1
NetP11_2: P11.2 U1.123 | length 1578
  Top Layer w10: U1.123 3508.08,3637.36 3514.52,3643.8 4050.26,3643.8 4161.46,3755 P11.2
NetP11_3: P11.3 U1.127 | length 1621.2
  Top Layer w10: U1.127 3336.61,3717.01 3367.78,3717.01 3447.28,3796.5 3663.5,3796.5 v1(3670,3790)
  Bottom Layer w10: v1(3670,3790) 3805,3655 P11.3
NetP11_4: P11.4 U1.126 | length 1593.4
  Top Layer w10: U1.126@3340,3695.64 3340.78,3696.42 3441.42,3696.42 v1(3475,3730)
  Bottom Layer w10: v1@3485,3710 3558,3637 4783,3637 P11.4
NetP11_5: P11.5 U1.121 | length 1588.5
  Top Layer w10: U1.121 3452.01,3597.99 v1(3495,3555)
  Bottom Layer w10: v1(3495,3555) 3595,3455 P11.5
NetP11_6: P11.6 U1.120 | length 1630.9
  Top Layer w10: U1.120 3401.74,3578.31 3425.05,3555 v1(3435,3555)
  Bottom Layer w10: v1@3430,3565 3640,3355 P11.6
NetR1_1: R1.1 U1.203 | length 705.2
  Top Layer w10: U1.203 2351.46,4621.46 v1(2400,4670)
  Bottom Layer w10: v1(2400,4670) 2505,4670 R1.1
NetR2_2: R2.2 U1.197 | length 532.6
  Top Layer w10: U1.197 2469.57,4577.95 2550,4658.39 R2.2
NetR3_2: R3.2 U1.33 | length 748.3
  Top Layer w10: R3.2 1690,3510 1720,3540 1720,3633.74 1759.26,3673 1907.68,3673 1923.63,3657.05 U1.33
SWCLK: P1.3 U1.159 | length 3182
  Top Layer w10: P1.3 2680,5345 3210,4815 3210,4420 3217.6,4412.4 U1.159
SWDIO: P1.4 U1.147 | length 4335
  Top Layer w10: P1.4 2630,5445 3735,4340 v1(3740,4340) ; U1.147 3394.1,4109.8 3400.3,4116 3628.04,4116 3629.77,4114.27 3775.73,4114.27 v1(3830,4060)
  Bottom Layer w10: v1(3740,4340) 3830,4250 v1(3830,4060)
VDD: C7.2 C8.2 C9.2 C10.2 C11.2 C12.2 C13.2 C14.2 C15.2 C16.2 C17.2 C18.2 C19.2 C20.2 C21.2 C22.2 C23.2 C24.2 C25.2 C26.2 C27.2 C28.2 C33.2 CB2.2 P1.1 R1.2 R4.1 U1.6 U1.15 U1.26 U1.39 U1.41 U1.42 U1.52 U1.59 U1.73 U1.83 U1.94 U1.103 U1.115 U1.118 U1.137 U1.150 U1.158 U1.171 U1.185 U1.204 | length 16261.3
  Top Layer w10: P1.1 706.5,5138.5 968.35,5138.5 C33.2 985,4630 v1(1090,4525) 1227,4662 2130.2,4662 2146.85,4645.35 C25.2 2163.5,4618.35 2163.5,4579.18 2331.77,4410.91 U1.204 ; C16.2 1326.3,3131.81 1342.95,3148.46 1496.81,3148.46 1612.58,3264.23 1669.23,3264.23 1905,3500 2173.86,3500 U1.41 ; v1(1415,4445) 1371.48,4401.48 1371.48,4350.14 1379.8,4358.46 1401.81,4358.46 1533.35,4490 1710,4490 2011.45,4188.54 U1.6 ; C20.2 1658.15,2956.81 1674.8,2973.46 2052.1,2973.46 2174.29,3095.66 U1.52 ; C9.2 1658.15,3223.15 1915,3480 2174.17,3480 U1.42 ; C28.2 1658.15,3351.81 1674.8,3368.46 1674.8,3459.8 1753.94,3538.94 2172.73,3538.94 2173.51,3538.16 U1.39 ; C19.2 1833.15,3846.81 1849.8,3863.46 1987.76,3863.46 2056.38,3794.84 U1.26 ; C24.2 1836.77,4011.38 U1.15 ; C17.2 2266.85,2966.81 2283.5,2983.46 2328.11,2983.46 2371.14,3026.49 U1.59 ; U1.73 2646.73,3092.34 2661.5,3077.57 2661.5,2971.65 C18.2 ; U1.185 2705.79,4516.4 2703.5,4518.68 2703.5,4663.35 C15.2 2686.85,4691.81 2703.5,4708.46 2748.11,4708.46 2904.65,4865 R1.2 ; U1.83 2843.58,3138.91 2951.5,3031 2951.5,2971.65 C21.2 ; C26.2 2886.85,4503.19 2981.38,4408.66 U1.171 ; U1.94 3060.12,3125.12 3025,3090 3025,2856.81 2870,2701.81 C22.2 2870,2678.19 2903.65,2644.54 3088.2,2644.54 C23.2@3116.85,2673.19 ; U1.103 3237.28,3072.72 3300,3010 3300,2944.98 3133.5,2778.48 3133.5,2701.65 C23.2 C23.2@3116.85,2673.19 ; U1.158 3238.19,4366.61 3238.19,4393.43 3296.3,4451.54 3380.2,4451.54 3396.85,4468.19 C12.2 ; U1.115 3381.58,3479.88 3508.51,3352.95 3548.35,3352.95 C14.2 3771.85,3336.3 C10.2 3773.19,3323.15 3642.5,3192.46 3642.5,3182.18 3528.46,3068.15 C13.2 ; U1.118 3384.81,3538.94 3428.74,3495 3487.33,3495 3543.35,3551.02 3543.35,3576.5 C7.2 ; U1.137@3345,3913.73 3345.78,3912.95 3743.39,3912.95 3788.19,3868.15 C11.2 ; U1.150@3345,4169.64 3345.78,4168.86 3467.21,4168.86 3513.35,4215 3863.35,4215 3876.15,4227.8 3994.84,4227.8 4012.84,4209.8 4143.35,4209.8 C8.2 4160,4500 R4.1 ; CB2.2 3796.06,2040 3179.53,2656.54 3133.5,2656.54 C23.2@3116.85,2673.19
  Bottom Layer w10: v1(1090,4525) 1295,4525 1395,4425
VDD_12_DSI: C5.2 U1.119 U1.125 | length 267.2
  Top Layer w10: U1.125@3350,3675.95 3350.78,3676.73 3471.28,3676.73 3477.54,3683 3518,3683 3543.35,3708.35 3543.35,3745.2 C5.2
VOLT_IN: C34.2 P2.1 U2.1 | length 1112.5
  Top Layer w10: C34.2 5260,2075 U2.1 5335,1900 P2.1
pads on no net: U1.1 U1.2 U1.3 U1.4 U1.5 U1.7 U1.8 U1.11 U1.12 U1.13 U1.16 U1.17 U1.18 U1.19 U1.20 U1.21 U1.22 U1.23 U1.24 U1.27 U1.28 U1.29 U1.30 U1.31 U1.35 U1.36 U1.37 U1.38 U1.46 U1.47 U1.48 U1.49 U1.57 U1.58 U1.61 U1.62 U1.63 U1.64 U1.65 U1.66 U1.67 U1.68 U1.69 U1.70 U1.71 U1.74 U1.75 U1.76 U1.77 U1.78 U1.79 U1.80 U1.81 U1.84 U1.85 U1.86 U1.87 U1.88 U1.89 U1.90 U1.91 U1.95 U1.96 U1.97 U1.98 U1.99 U1.100 U1.101 U1.102 U1.104 U1.105 U1.106 U1.107 U1.108 U1.109 U1.110 U1.111 U1.112 U1.113 U1.116 U1.117 U1.129 U1.130 U1.131 U1.132 U1.133 U1.134 U1.135 U1.138 U1.139 U1.140 U1.141 U1.151 U1.152 U1.153 U1.154 U1.155 U1.156 U1.157 U1.161 U1.162 U1.163 U1.164 U1.165 U1.166 U1.167 U1.168 U1.169 U1.172 U1.173 U1.174 U1.175 U1.176 U1.178 U1.179 U1.180 U1.181 U1.182 U1.183 U1.186 U1.187 U1.188 U1.189 U1.191 U1.192 U1.193 U1.194 U1.195 U1.196 U1.198 U1.199 U1.200 U1.201 U1.205 U1.206 U1.207 U1.208

## Polygon pours and split planes (outlines as drawn)
GND on Bottom Layer "GND Plane" (solid, pour order 10): 330,5995 5790,5995 5790,1195 330,1195

## Silkscreen, mask and mechanical layers (free items; w line width, h text height)
Top Paste:
  text "Ethan Peterson / ARM Development Platform MK 1" at 3930,1295 h60

## Text inside footprints (layer, text, board x,y; h text height)
LED2: Top Overlay "K" at 5305,4755 h30 r180; Mechanical 15 "K" at 5305,4755 h30 r180
LED3: Top Overlay "K" at 5305,5490 h30 r180; Mechanical 15 "K" at 5305,5490 h30 r180